# Altium PCB LiPoBattery.PcbDoc
Units mil, origin at the board's own origin, x right, y up, seen from the top; angles counter-clockwise.
Board outline 2000 x 2250 mil, 2 copper layers (Top Layer, Bottom Layer); 22 components, 10 nets, 56 pads, 12 vias.
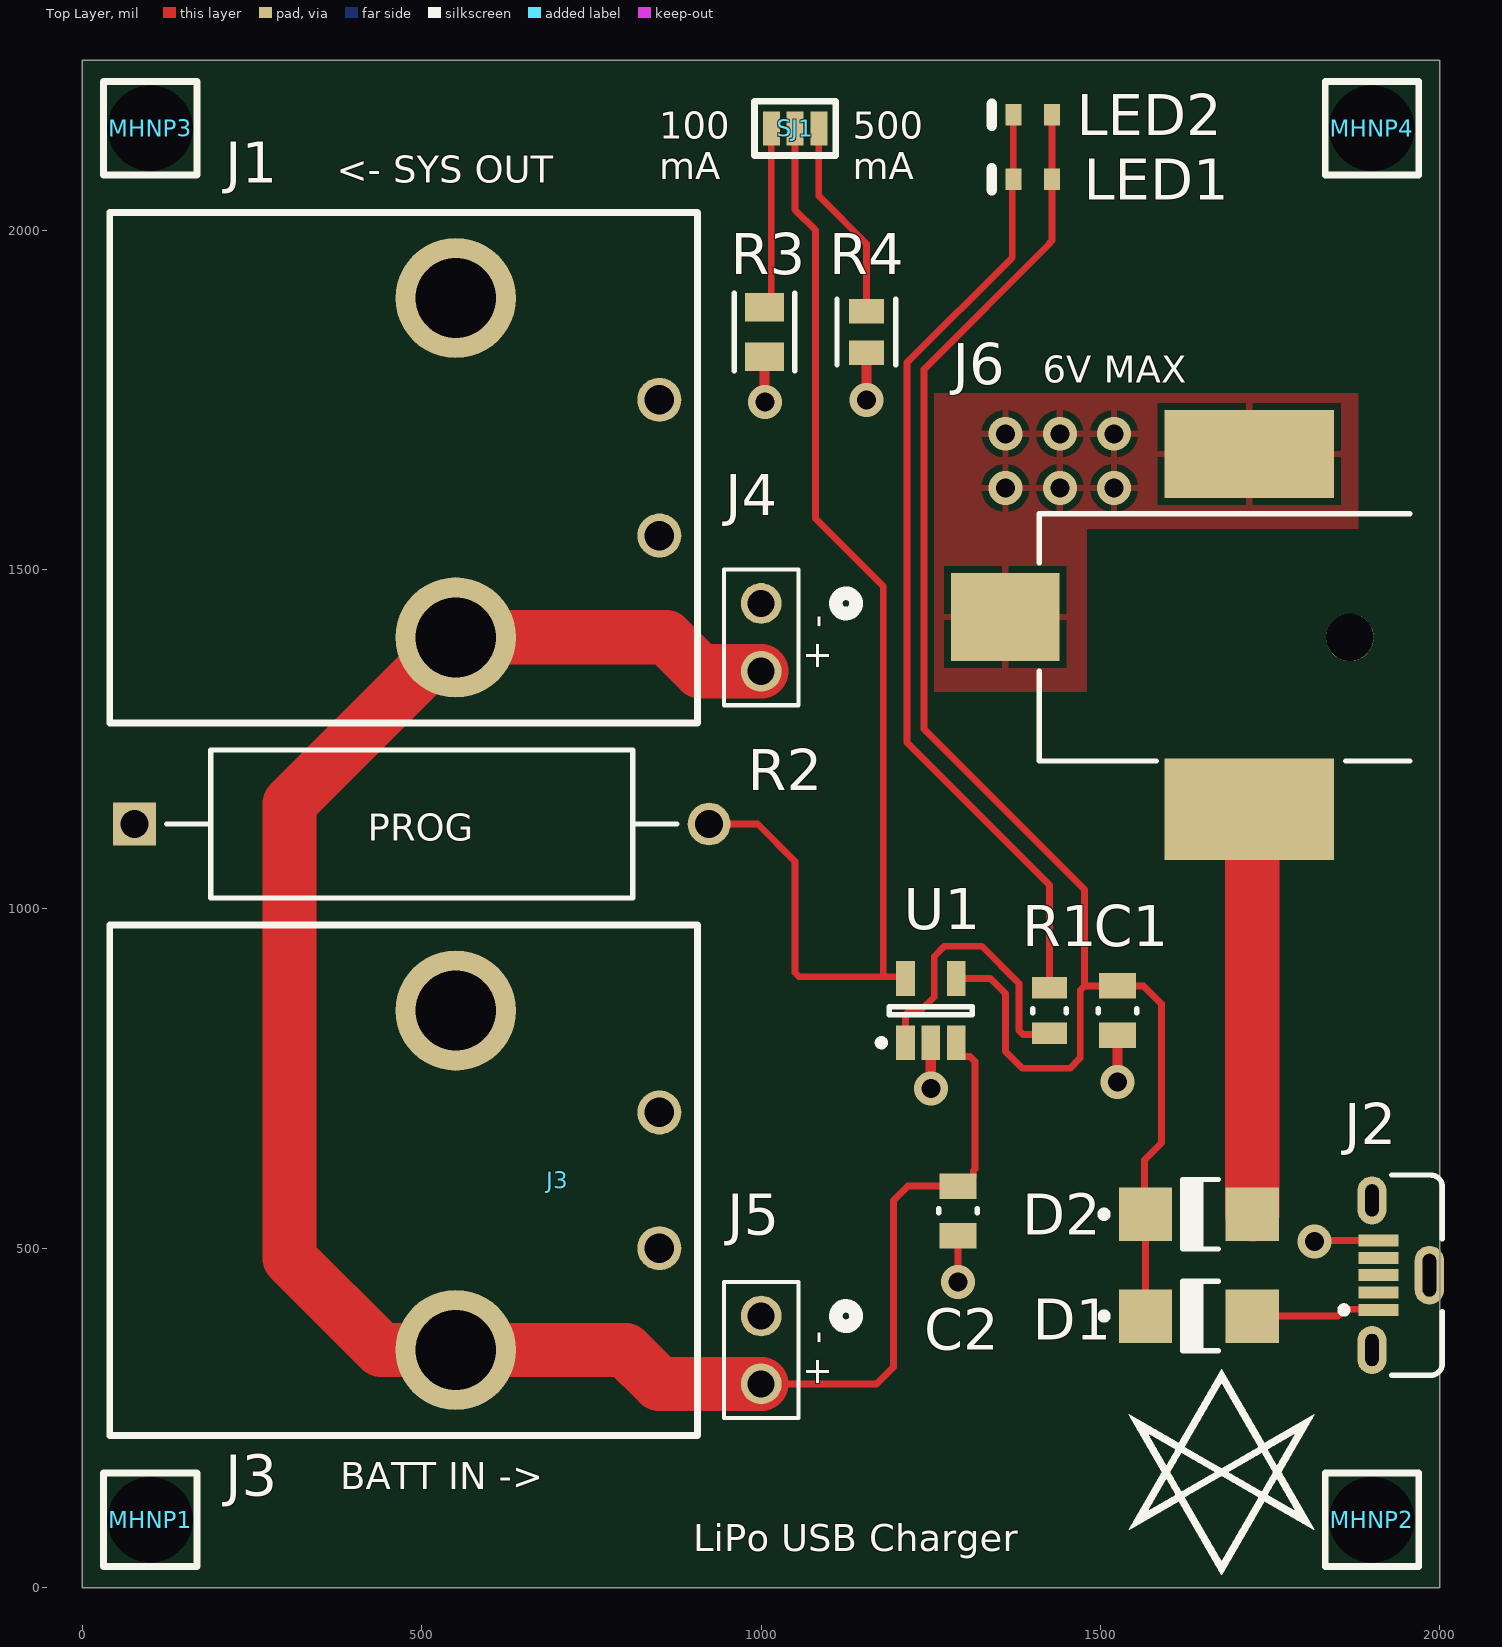
[diagram p0: Top Layer view]
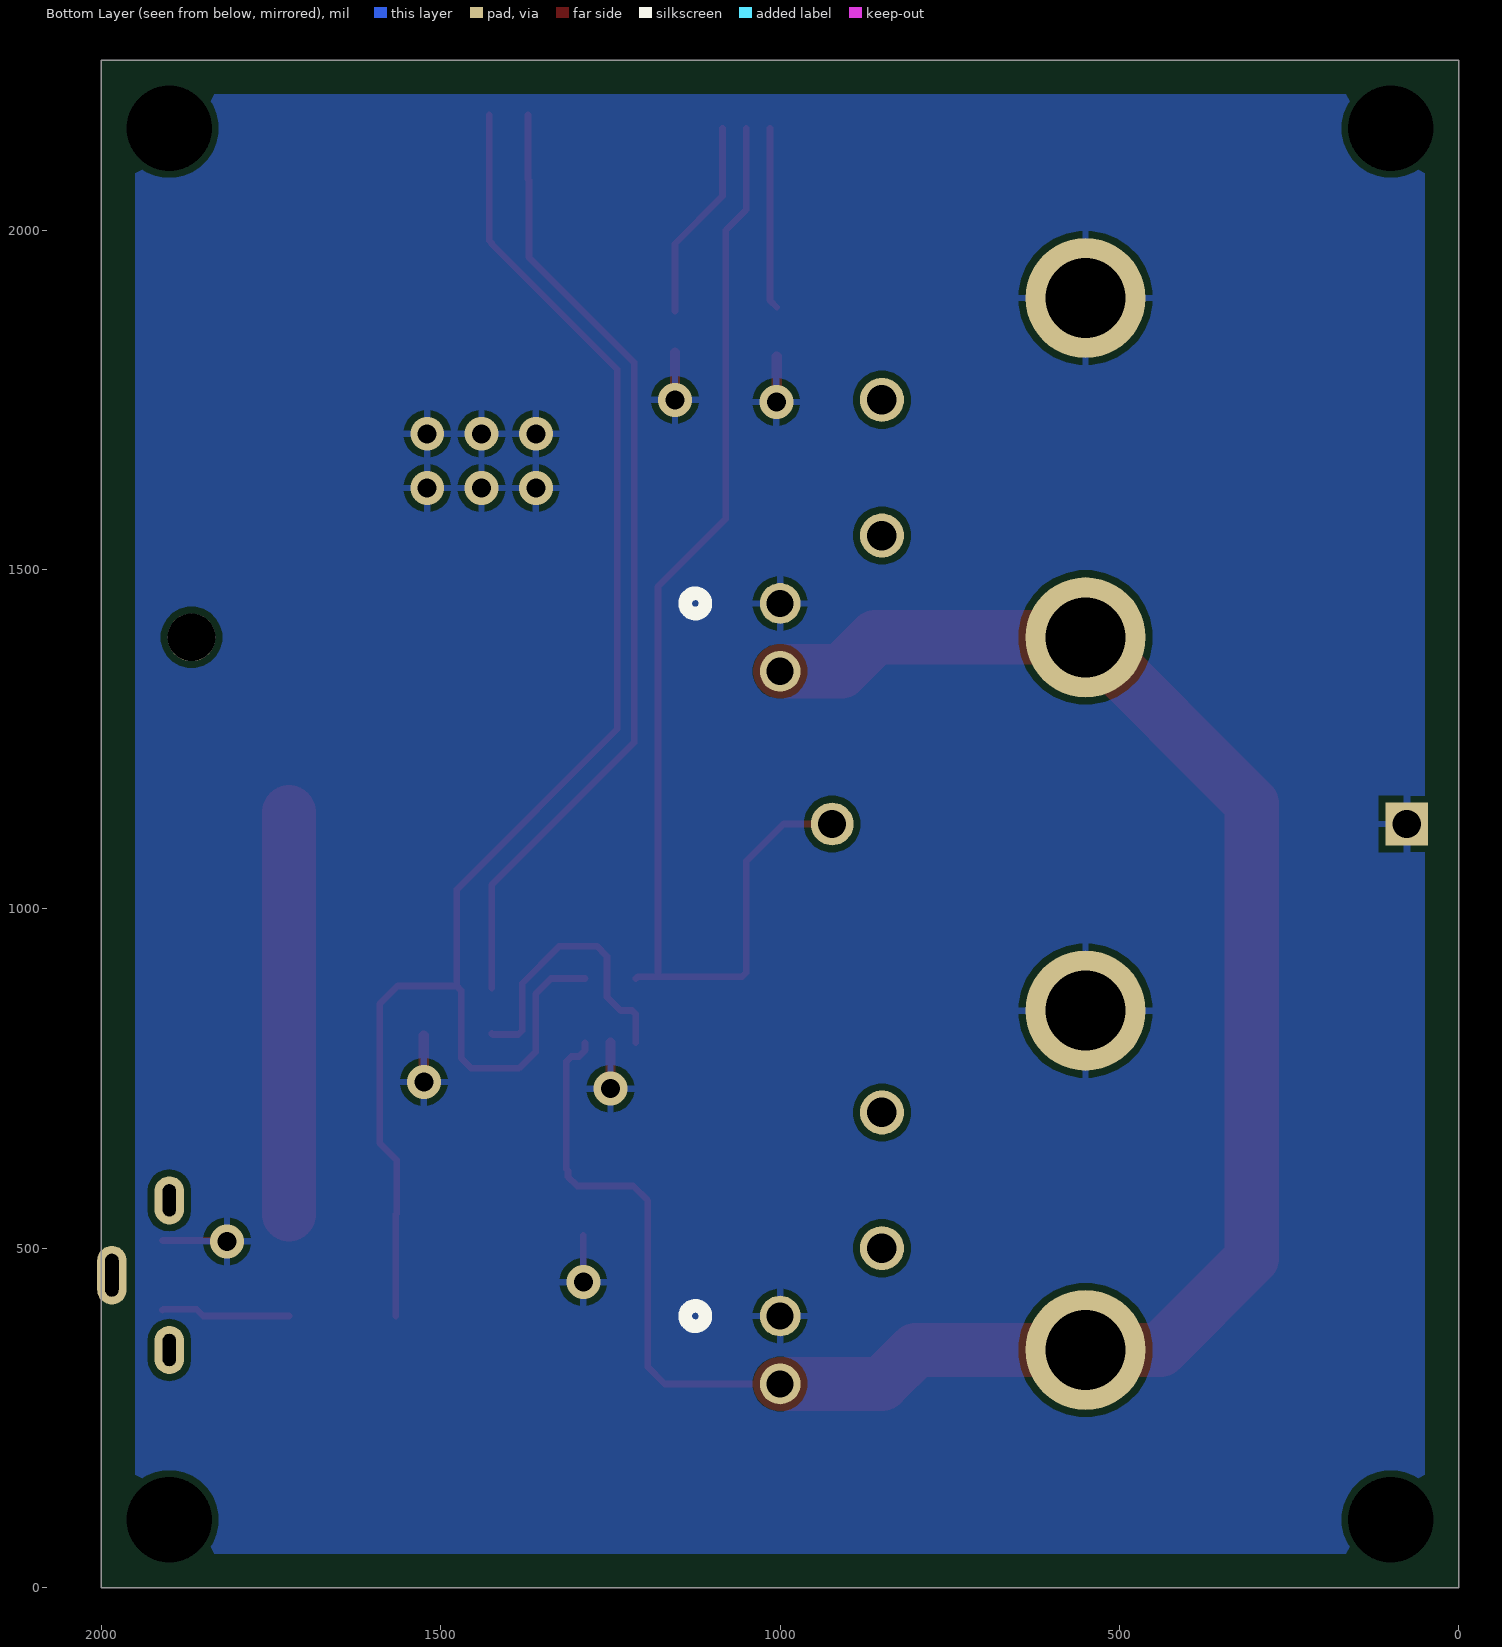
[diagram p1: Bottom Layer view, seen from below]
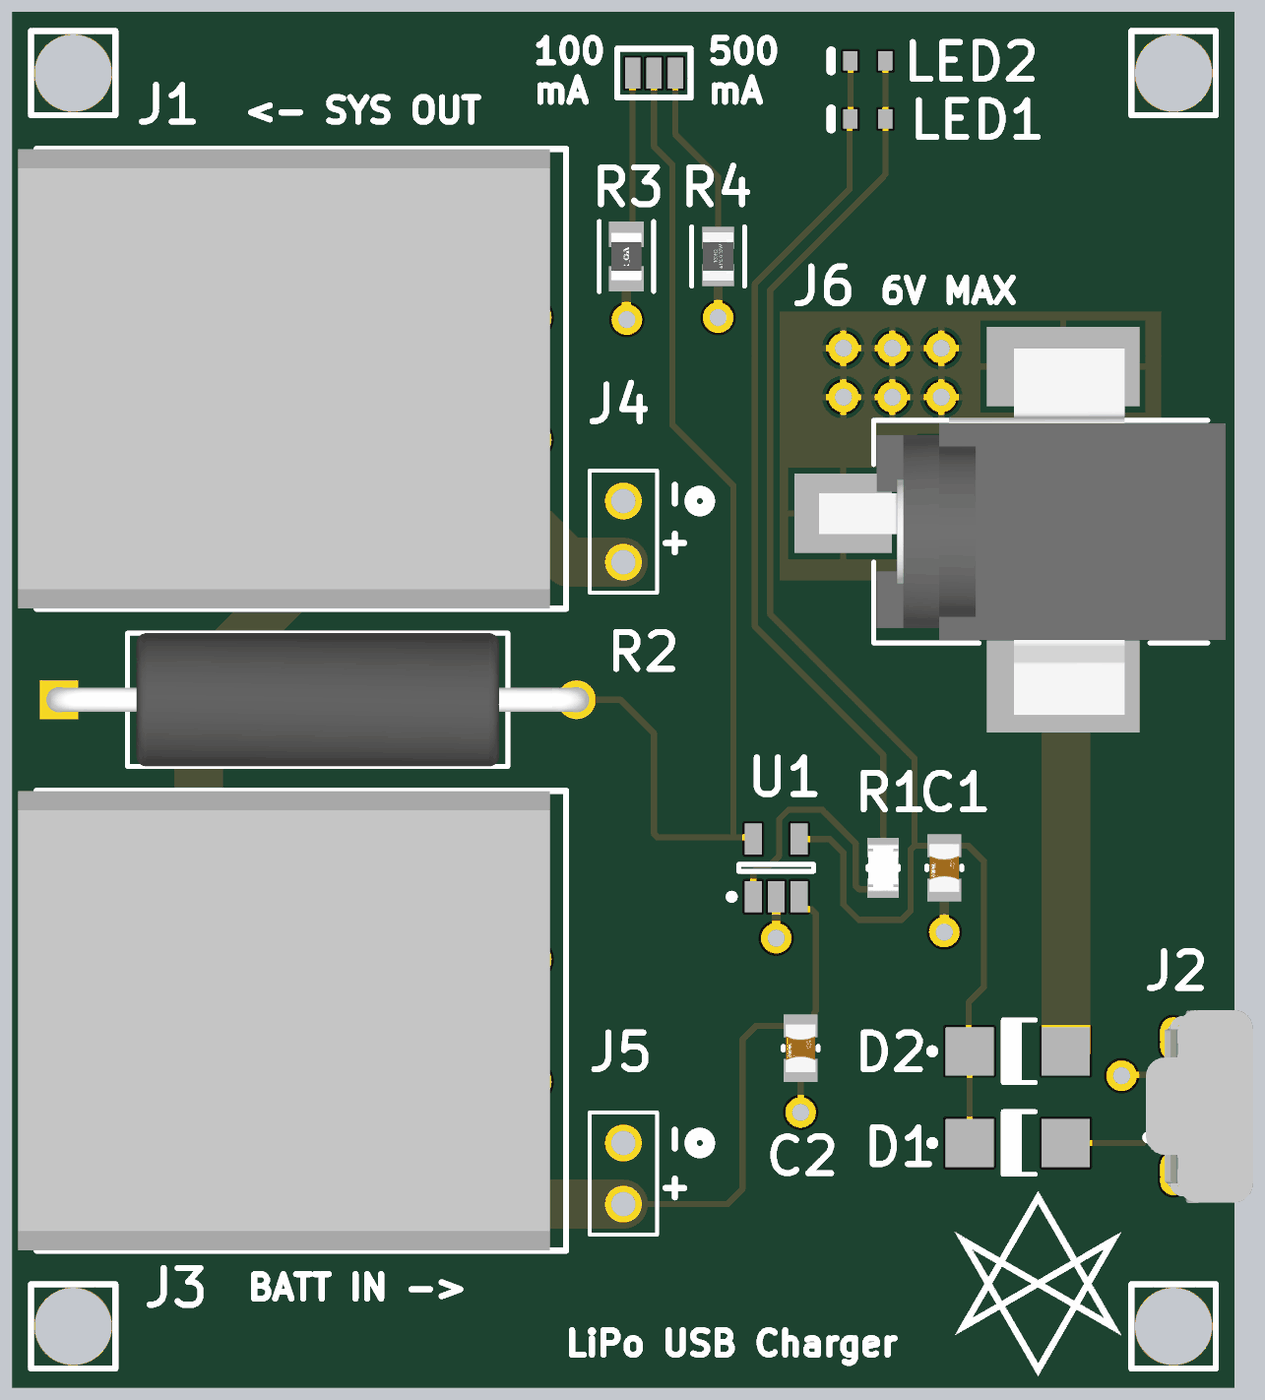
[diagram p2: 3D render of the assembled board from above, using the file's embedded part models]

## Layer stack, top to bottom
Top Solder: solder mask 0.4, Solder Resist, Dk 3.5
Top Layer: signal copper 1.4
Dielectric 1: dielectric 12.6, FR-4, Dk 4.8
Bottom Layer: signal copper 1.4
Bottom Solder: solder mask 0.4, Solder Resist, Dk 3.5

## Board outline
0,0 0,2250 2000,2250 2000,0

## Design rules (kind name [scope] priority, off if disabled: settings)
Clearance [All] p1: gap=10 ignorepadtopadclearanceinfootprint=TRUE
PolygonConnect [All] p1: connectstyle=Relief reliefconductorwidth=10 reliefentries=4 polygonreliefangle="90 Angle" airgapwidth=10
RoutingVias [All] p1: holewidth=28 width=50 viastyle="Through Hole" minholewidth=28 minwidth=50 maxholewidth=28 maxwidth=50
SolderMaskExpansion [All] p1: expansion=4 istentingtop=FALSE
SupplyNets "Schematic Supply Nets" [InNet('GND')] p1: voltage=0.000
Width [All] p1: maxlimit=100 minlimit=10 preferedwidth=10
30 further rules are at their usual default settings.

## Components (designator, comment, footprint, x,y, rotation, side; value= is the part's Value field where it differs from the comment)
C1 "4.7uF" FP-CC0805-0_85-MFG 1525,850 r270 top value="4.7 uF"
C2 "4.7uF" FP-CC0805-0_85-MFG 1290,555 r270 top value="4.7 uF"
D1 "40V, 1A" ONSC-SMA-2-403D-02_V 1645,400 r0 top
D2 "40V, 1A" ONSC-SMA-2-403D-02_V 1645,550 r0 top
J1 "CONN HEADER R/A 2POS 5.08MM" 1-179276-2 550,1900 r270 top locked
J2 "Micro-USB B Receptacle" MOLX-105133-0001_V 1942.32,460.24 r90 top
J3 "CONN HEADER R/A 2POS 5.08MM" 1-179276-2 550,850 r270 top locked
J4 "2 POS VERT HEADER 0.100'" 2Pins_AMP 1000,1450 r180 top
J5 "2 POS VERT HEADER 0.100'" 2Pins_AMP 1000,400 r180 top
J6 "CONN PWR JACK 2.1X5.5MM SOLDER" FP-RASM722PTR13X-MFG 1700,1400 r90 top locked
LED1 "RED" VISH-TLMS1000_V 1400,2075 r180 top
LED2 "RED" VISH-TLMS1000_V 1400,2170 r180 top
MHNP1 "Mounting Hole Non-Plated 3.2mm" MTHNP3P2MM 100,100 r90 top locked
MHNP2 "Mounting Hole Non-Plated 3.2mm" MTHNP3P2MM 1900,100 r90 top locked
MHNP3 "Mounting Hole Non-Plated 3.2mm" MTHNP3P2MM 100,2150 r90 top locked
MHNP4 "Mounting Hole Non-Plated 3.2mm" MTHNP3P2MM 1900,2150 r90 top locked
R1 "330" FP-CRCW0805-e3-IPC_C 1425,850 r270 top
R2 "PROG" FP-RS02B-MFG 500,1125 r0 top
R3 "2k" FP-RN73R2A-IPC_B 1005,1850 r90 top
R4 "10k" FP-CRGP0805-IPC_C 1155,1850 r90 top value=10KΩ
SJ1 "SJUMPER3POS" SJUMPER3POS-Footprint-1 1050,2150 r0 top
U1 "Charge Management Controller" SOT-23-OT5_M 1250,850 r90 top

## Footprints (in the part's own frame and the unit in brackets; to place one, negate y for a bottom-side part, rotate by r counter-clockwise, add the part's x,y. Pads: shape width x height; smd on the part's side, far side on the other; paste and mask are expansions set on the pad)
1-179276-2 [mm] "2_POS_HDR_X19MMY22MM"
  round 4.5 hole 3 unplated mask+0.1: 1(0,0)
  round 4.5 hole 3 mask+0.1: 2(12.7,0)
  round 1.65 hole 1.1 mask+0.1: ""(3.81,7.62) ""(8.89,7.62)
  silkscreen extent -3.2,-12.95 15.9,9.05, body extent -3.19,-13.73 15.89,8.37, height 10.86
2Pins_AMP [mil]
  round 60 hole 40 paste-99999 mask+0: 1(0,0) 2(0,100)
  silkscreen extent -140,-50 55,150
FP-CC0805-0_85-MFG [mm]
  rect 0.95x1.4 smd paste+0 mask+0: 1(-0.925,0) 2(0.925,0)
  silkscreen extent -0.08,-0.72 0.08,0.72, body extent -1.6,-1.05 1.6,1.05, height 0.25
FP-CRCW0805-e3-IPC_C [mil]
  rect 31.75x51.5 smd paste+0 mask+0: 1(-33.5,0) 2(33.5,0)
  silkscreen extent -3,-25 3,25, body extent -53,-31 53,31, height 10
FP-CRGP0805-IPC_C [mil]
  rect 35.67x51.57 smd paste+0 mask+0: 1(-30.55,0) 2(30.55,0)
  silkscreen extent -48,-43 48,43, body extent -52,-31 52,31, height 10
FP-RASM722PTR13X-MFG [mm]
  rect 3.3x4.06 smd paste+0 mask+0: 1(0.76,8.65)
  rect 3.81x6.35 smd paste+0 mask+0: 2(-6.43,-0.49)
  rect 3.3x6.35 smd paste+0 mask+0: 3(6.86,-0.49)
  round 1.78 hole 1.78 unplated paste-2539.97 mask+0: ""(0,-4.25)
  silkscreen extent -4.63,-6.5 4.63,7.38, body extent -8.43,-7.48 8.61,10.78, height 0.25
FP-RN73R2A-IPC_B [mil]
  rect 41.54x57.33 smd paste+0 mask+0: 1(-36.44,0) 2(36.44,0)
  silkscreen extent -57,-44 57,44, body extent -67,-39 67,39, height 10
FP-RS02B-MFG [mm]
  rect 1.6x1.6 hole 1.05 paste-2539.97 mask+0: 1(-10.751,0)
  round 1.6 hole 1.05 paste-2539.97 mask+0: 2(10.751,0)
  silkscreen extent -9.55,-2.77 9.55,2.77, body extent -11.65,-2.87 11.65,2.87, height 0.25
MOLX-105133-0001_V [mm] "Micro USB B, 5-Leads, Pitch 0.65mm"
  rect 0.45x1.5 smd: 1(-1.3,0.825) 2(-0.65,0.825) 3(0,0.825) 4(0.65,0.825) 5(1.3,0.825)
  oval 1.8x1.1 hole 0.5 slot 1.2 at 0 deg: 6(-2.8,1.075) 7(2.8,1.075)
  oval 2.2x1.1 hole 0.5 slot 1.6 at 0 deg: 8(0,-1.075)
  silkscreen extent -3.75,-1.56 3.75,2.25, body extent -4.02,-2.22 4,2.23, height 7.51
MTHNP3P2MM [mm] "Mounting Hole Non-Plated 3.2mm drill hole"
  round 1 hole 3.2 mask+0.1: ""(0,0)
  silkscreen extent -1.75,-1.75 1.75,1.75
ONSC-SMA-2-403D-02_V [mm] "Molded, 2-Leads, Body 4.57x2.92mm"
  rect 2x2 smd: 1(-2,0) 2(2,0)
  silkscreen extent -3.67,-1.3 0.74,1.3, body extent -2.16,-1.3 2.16,1.3, height 2.2
SJUMPER3POS-Footprint-1 [mil]
  rect 25x50 smd mask+3.94: 1(-35,0) 2(0,0) 3(35,0)
  silkscreen extent -60,-40 60,40
SOT-23-OT5_M [mm] "SOT23, 5-Leads, Body 2.9x1.7mm, Pitch 0.95mm, Lead Span 2.8mm, IPC Low Density"
  rect 1.3x0.7 smd: 1(-1.2,0.95) 2(-1.2,0) 3(-1.2,-0.95) 4(1.2,-0.95) 5(1.2,0.95)
  silkscreen extent -1.32,-1.55 0.15,1.97, body extent -0.9,-1.55 0.9,1.55, height 1.45
VISH-TLMS1000_V [mm] "SMD, 2-Leads, Body 0.8x1.6mm"
  rect 0.6x0.8 smd: 1(-0.725,0) 2(0.725,0)
  silkscreen extent 1.52,-0.4 1.52,0.4, body extent -0.8,-0.4 0.8,0.4, height 0.65

## Part data
C1 C2: library part CMP-03422-001342-1, "CAP CER 4.7UF 6.3V X7R 0805", Capacitance="4.7 uF", Manufacturer=Yageo, Manufacturer Part Number=CC0805KKX7R5BB475, Package=CC0805-0.85, Temperature="-30°C to +85°C", Temperature Characteristic=X7R, Temperature Range High=+85°C, Temperature Range Low=-30°C, Tolerance=0.1, Voltage Rating="6.3 V", Automotive=No, Category=Cap, ComponentLink2Description=Datasheet, ComponentLink2URL=http://www.yageo.com/documents/recent/UPY-GPHC_Y5V_6.3V-to-50V_8.pdf, Device Class L1="Passive Components", Device Class L2=Capacitors, Device Class L3="Ceramic Capacitors", Digikey Description="CAP CER 4.7UF 6.3V X7R 0805", Footprint Url=http://www.yageo.com/exep/pages/download/literatures/UPY-C_GEN_24.pdf, Height=0.95mm, Ipc Land Pattern Name=CAPC200125X85, Lead Free=Yes, Material=Ceramic, Mouser Description="Multilayer Ceramic Capacitors MLCC - SMD/SMT 4.7uF 6.3V X7R 10%", Octopart=https://octopart.com/cc0805kkx7r5bb475-yageo-27548069, RoHS=TRUE
D1 D2: library part CMP-1055-00320-1, "Schottky Power Rectifier, 2-Pin SMA, Pb-Free, Tape and Reel", Manufacturer="On Semiconductor", PartNumber=MBRA140T3G, ComponentLink1Description="Manufacturer URL", ComponentLink1URL=http://www.onsemi.com/, ComponentLink2Description=Datasheet, ComponentLink2URL=http://www.onsemi.cn/pub_link/Collateral/MBRA140T3-D.PDF, ComponentLink3Description="Package Specification", ComponentLink3URL=http://www.onsemi.com/pub_link/Collateral/403D-02.PDF, Configuration=Single, DatasheetVersion="Rev. 10", IFSM Max (A)=30, Mounting Technology="Surface Mount", PackageDescription="2-Pin Small Molded Package, J-Bend Lead, Body 2.605 x 4.315 mm", PackageReference=SMA-2-403D-02, PackageVersion="Rev. G, 07/2012", Packing="Tape and Reel", RoHS=TRUE
J1 J3: library part 1-179276-2, "Connector Header Through Hole, Right Angle 2 position 0.200\" (5.08mm)", Manufacturer="TE Connectivity AMP Connectors", Supplier Part Number 1=A29545-ND, ComponentLink1Description="Product URL", ComponentLink1URL=https://www.te.com/en/product-1-179276-2.html, Manufacturer Part Number=1-179276-2, Supplier 1=DigiKey
J2: library part CMP-2000-05829-1, "Micro-USB B Receptacle, Vertical, -30 to 85 degC, 5-Pin SMD, RoHS, Tape and Reel", Color=Black, Current Rating=1.8A, Flammability Rating=UL94V-0, Manufacturer=Molex, Package Description="5-Pin Surface Mount Device, Pitch 0.65 mm", Package Reference=105133-0001, Package Version="Rev. C, 11/2015", Voltage - Max=30V, Voltage Rating=30VAC, Brand=Molex, Connector Type=MicroUSBTypeBReceptacle, Contact Material=CopperAlloy, Contact Plating=Gold, Datasheet URL=http://www.molex.com/webdocs/datasheets/pdf/en-us/1051330001_IO_CONNECTORS.pdf, Datasheet Version=03/2016, Factory Pack Quantity=6000, Gender=Receptacle, Manufacturer URL=http://www.molex.com/, Mounting Angle=Vertical, Mounting Style=SMD/SMT, Mounting Technology=SurfaceMount, Number of Ports=1, Package URL=http://www.molex.com/pdm_docs/sd/1051330001_sd.pdf, Packaging=Reel, PartNumber=105133-0001, Product=MicroUSBTypeBConnectors, Product Category=USBConnectors, RoHS=Details, Series=105133, Standard=USB, Termination Style=SolderTail
J4 J5: library part 67997-402HLF, "Connector Header Through Hole 2 position", Manufacturer_Name="Amphenol ICC", Supplier Part Number 1=609-5502-ND, Copyright="Copyright (C) 2025 Ultra Librarian. All rights reserved.", Manufacturer_Part_Number=67997-402HLF, RefDes=RefDes, Supplier 1=DigiKey, Type=Type
J6: library part CMP-47995-000002-1, Case/Package=SMD/SMT, Color=Black, Current Rating=5A, Package Quantity=120, Connector Type=Jack, Contact Material="Copper Alloy", Contact Plating=Tin, Gender=Male, Housing Color=Black, Housing Material=Thermoplastic, Mount="Surface Mount", Shielding=Unshielded, Termination=Solder
LED1 LED2: library part CMP-2000-07254-1, "Low Current LED, 40 mW, 1.8 V, -40 to 100 degC, 2-Pin SMD (0603), RoHS, Tape and Reel", Forward Current If=2mA, Forward Voltage=1.8V, LED Colour=Red, Manufacturer=Vishay, Package Description="2-Pin Surface Mount Device, Body 1.6 x 0.8 mm", Package Reference=TLMS1000, Automotive Qualification Standard=AEC-Q100, Bulb Size=1.6mmx0.8mm, Datasheet URL=https://datasheet.ciiva.com/5798/1698881-5798337.pdf, Datasheet Version="Rev. 1.7, 02/2011", LED Mounting=SMD, Lens Shape=Rectangular, Luminous Intensity=4mcd, Manufacturer URL=http://www.vishay.com/, Mounting Technology=SurfaceMount, MSL=MSL2-1year, Packaging=CutTape, Product Range=-, SVHC=ToBeAdvised, Viewing Angle=80°, Wavelength Typ=636nm
MHNP1 MHNP2 MHNP3 MHNP4: library part MTHNP3P2MM, "Mounting Hole Non-Plated 3.2mm drill hole"
R1: library part CMP-2001-03824-2, "RES Thick Film, 330Ω, 5%, 0.125W, 200ppm/°C, 0805", Case Code (Imperial)=0805, Case Code (Metric)=2012, Max Operating Temperature=155°C, Max Power Dissipation=125mW, Min Operating Temperature=-55°C, Package Quantity=1, Resistance=330R, Temperature Coefficient=200ppm/°C, Tolerance=5%, Voltage Rating=150V, Case/Package=0805, Composition="Thick Film", Contact Plating=Tin, Depth=1.25mm, Features="Automotive AEC-Q200", Height=0.02inch, Lead Free="Lead Free", Length=2mm, Military Standard=Not, Number of Terminations=2, Packaging="Tape and Reel", Power Rating=125mW, Radiation Hardening=No, Termination=SMD/SMT, Voltage Rating (DC)=150V, Weight=0.000194oz, Width=0.049inch
R2: library part CMP-02408-000037-1, "Res Wirewound 12K Ohm 1% 3W ±20ppm/°C Ceramic Hi Temp Sil AXL Thru-Hole Bulk", Case/Package=Ceramic, Max Operating Temperature=250°C, Min Operating Temperature=-65°C, Package Quantity=100, Power Rating=3W, Resistance=12kR, Resistor Type=Wirewound, Temperature Coefficient=20ppm/°C, Tolerance=1%, Contact Plating=Tin, Diameter=4.75mm, Lead Diameter=0.81mm, Lead Free="Lead Free", Length=14.22mm, Mount="Through Hole", RoHS Compliant=Yes, Series=RS, Termination=Axial, Weight=0.024692oz, Width=4.75mm
R3: library part CMP-04015-025035-1, "2kΩ ±0.5% 0.125W, 1/8W Chip Resistor 0805 (2012 Metric) Moisture Resistant Thin Film"
R4: library part CMP-03211-006861-1, "CRGP 0805 10K 1%", Ambient Temperature Range High=+70°C, Manufacturer=TE, Manufacturer Part Number=CRGP0805F10K, Package=CRGP0805, Power Rating=0.33W, Resistance=10KΩ, Temperature="-55°C to +155°C", Temperature Coefficient=±100ppm/°C, Temperature Range High=+155°C, Temperature Range Low=-55°C, Tolerance=0.01, Voltage Rating=150V, Automotive=No, Category=Res, ComponentLink2Description=Datasheet, ComponentLink2URL=https://www.mouser.com/datasheet/2/418/NG_DS_9-1773463-9_A-1358566.pdf, Composition="Thick Film", Device Class L1="Passive Components", Device Class L2=Resistors, Device Class L3="Chip SMD Resistors", Digikey Description="CRGP 0805 10K 1%", Height=0.65mm, Ipc Land Pattern Name=RESC200125X55, Lead Free=Yes, Octopart=https://octopart.com/crgp0805f10k-te+connectivity-91018782, RoHS=TRUE, Series=CRGP
SJ1: library part CMP-00030-00001-2, "Solder jumper 3 pads and pins", Pins=3
U1: library part CMP-0133-00139-1, "Simple, Miniature Single-Cell, Fully Integrated Li-Ion/Li-Polymer Charge Management Controller, 4.2V, 5-Pin SOT-23, Industrial Temperature, Tape and Reel", Code_IPC=SOT23-5, DatasheetVersion="revB, Sep-2007", PackageDescription="5-Lead Plastic Small Outline Transistor (OT) [SOT-23]", PackageReference=SOT-23-OT5, PackageVersion="revBB, Aug-2009"

## Via types
v1: diameter 50, hole 28, Top Layer to Bottom Layer, 12 vias

## Nets (pads, with @x,y where several pads share a name; then routed paths per layer and width w, separated by ;. In a path a pad name is that pad's centre, name@x,y a point inside that pad or via, vN(x,y) a via of type N, cw(c..) or ccw(c..) an arc to the next point about the centre after c; other vN are vias at no path point)
GND: C1.2 C2.2 J1.1 J2.5 J3.1 J4.1 J5.1 J6.1 J6.3 R2.1 R3.1 R4.1 U1.2 | length 440.5
  Top Layer w10: v1(1290,450) C2.2 ; v1(1815,510) 1820,510 1821.42,511.42 J2.5
  Top Layer w15: R3.1 1005,1745 1005.64,1745.64 v1(1005.64,1746.85) ; v1(1155,1750) R4.1 ; v1(1250,735) U1.2 ; v1(1525,745) C1.2
  other v1: 1360,1620 1440,1620 1520,1620 1360,1700 1440,1700 1520,1700
NetC1_1: C1.1 D1.1 D2.1 LED1.1 LED2.1 U1.4 | length 2457.5
  Top Layer w10: U1.4 1337.76,897.24 1360,875 1360,790 1385,765 1455,765 1470,780 1470,880 1476.42,886.42 ; LED2.1 1428.54,1984.41 1425,1980.87 1425,1980 1240,1795 1240,1265 1476.42,1028.58 1476.42,886.42 ; D1.1 D2.1 1565,551.26 1565,630 1590,655 1590,860 1563.58,886.42 C1.1 1476.42,886.42
NetC2_1: C2.1 J1.2 J3.2 J4.2 J5.2 U1.3 | length 3058.1
  Top Layer w10: J5.2 1170,300 1195,325 1195,570 1216.42,591.42 1298.86,591.42 1312.56,605.12 1312.56,613.98 1315,616.42 1315,775.16 1307.69,782.46 1296.18,782.46 1287.4,791.24 U1.3
  Top Layer w80: J5.2 850,300 800,350 J3.2 440,350 305,485 305,1155 J1.2 860,1400 910,1350 J4.2
NetD1_2: D1.2 J2.1 | length 190.6
  Top Layer w10: D1.2 1850,400 1860,410 1908.9,410 J2.1
NetD2_2: D2.2 J6.2 | length 598.7
  Top Layer w10: J6.2 J6.2@1723.74,1142.4
  Top Layer w80: D2.2 J6.2@1723.74,1142.4
NetLED1_2: LED1.2 LED2.2 R1.1 | length 1438.3
  Top Layer w10: LED2.2 LED1.2 1370,2073.54 1370,1960 1215,1805 1215,1245 1425,1035 R1.1
NetR1_2: R1.2 U1.1 | length 425.7
  Top Layer w10: U1.1 1212.6,844.14 1218.46,850 1235,850 1255,870 1255,930 1270,945 1325,945 1380,890 1380,820.86 1385.86,815 1423.5,815 R1.2
NetR2_2: R2.2 SJ1.2 U1.5 | length 1783.7
  Top Layer w10: R2.2 995,1125 1050,1070 1050,905.86 1055.86,900 1180,900 ; SJ1.2 1050,2030 1080,2000 1080,1575 1180,1475 1180,900 ; U1.5 1209.84,900 1180,900
NetR3_2: R3.2 SJ1.1 | length 267.7
  Top Layer w10: R3.2 1015,1896.44 SJ1.1
NetR4_2: R4.2 SJ1.3 | length 298.4
  Top Layer w10: SJ1.3 1085,2050 1155,1980 R4.2
pads on no net: J1. J2.2 J2.3 J2.4 J2.6 J2.7 J2.8 J3. J6. MHNP1. MHNP2. MHNP3. MHNP4.

## Polygon pours and split planes (outlines as drawn)
GND on Bottom Layer "GND_L02_P000" (solid, pour order 0): 50,2200 1950,2200 1950,50 50,50
GND on Top Layer "GND_L01_P001" (solid, pour order 1): 1880,1760 1880,1560 1480,1560 1480,1320 1240,1320 1240,1760

## Silkscreen, mask and mechanical layers (free items; w line width, h text height)
Top Overlay:
  region: 3604 vertices and 8 holes, not listed, extent 1541.74,18.48 1815.13,321.37
  text "100 / mA" at 850,2075 h40
  text "500 / mA" at 1135,2075 h40
  text "<- SYS OUT" at 375,2070 h40
  text "6V MAX" at 1415,1775 h40
  text "+ -" at 1100,1350 h40 r90
  text "PROG" at 420,1100 h40
  text "+ -" at 1100,295 h40 r90
  text "BATT IN ->" at 380,145 h40
  text "LiPo USB Charger" at 900,53.33 h40